# Altium PCB RWSv3a.PcbDoc
Units mil, origin at the board's own origin, x right, y up, seen from the top; angles counter-clockwise.
Board outline 3625 x 3400 mil, 2 copper layers (Component Side, Bottom Layer), stack 65.756 mil thick; 75 components, 63 nets, 336 pads, 90 vias.
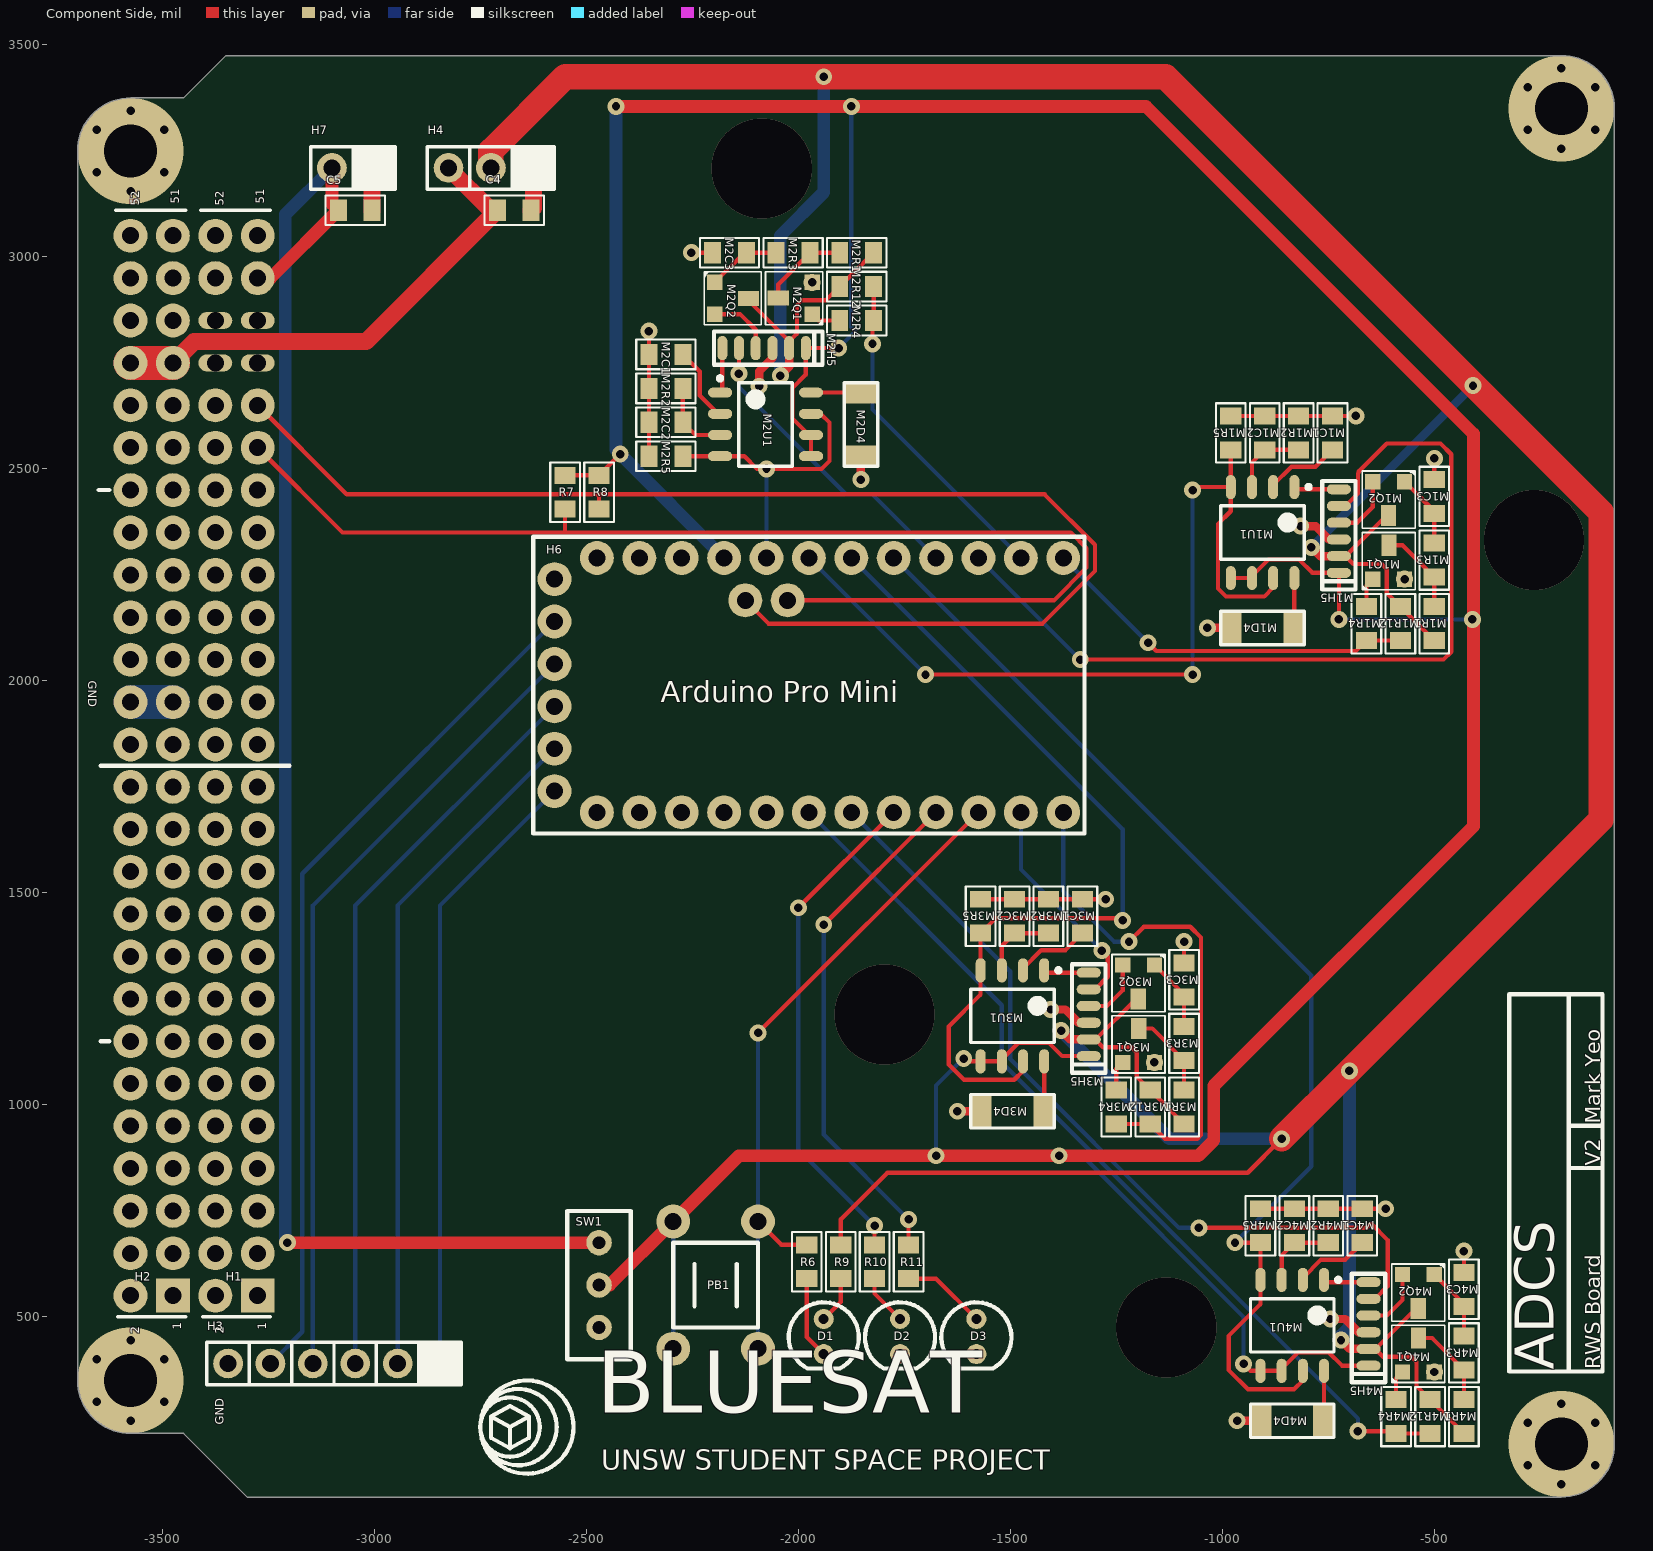
[diagram p0: Component Side view]
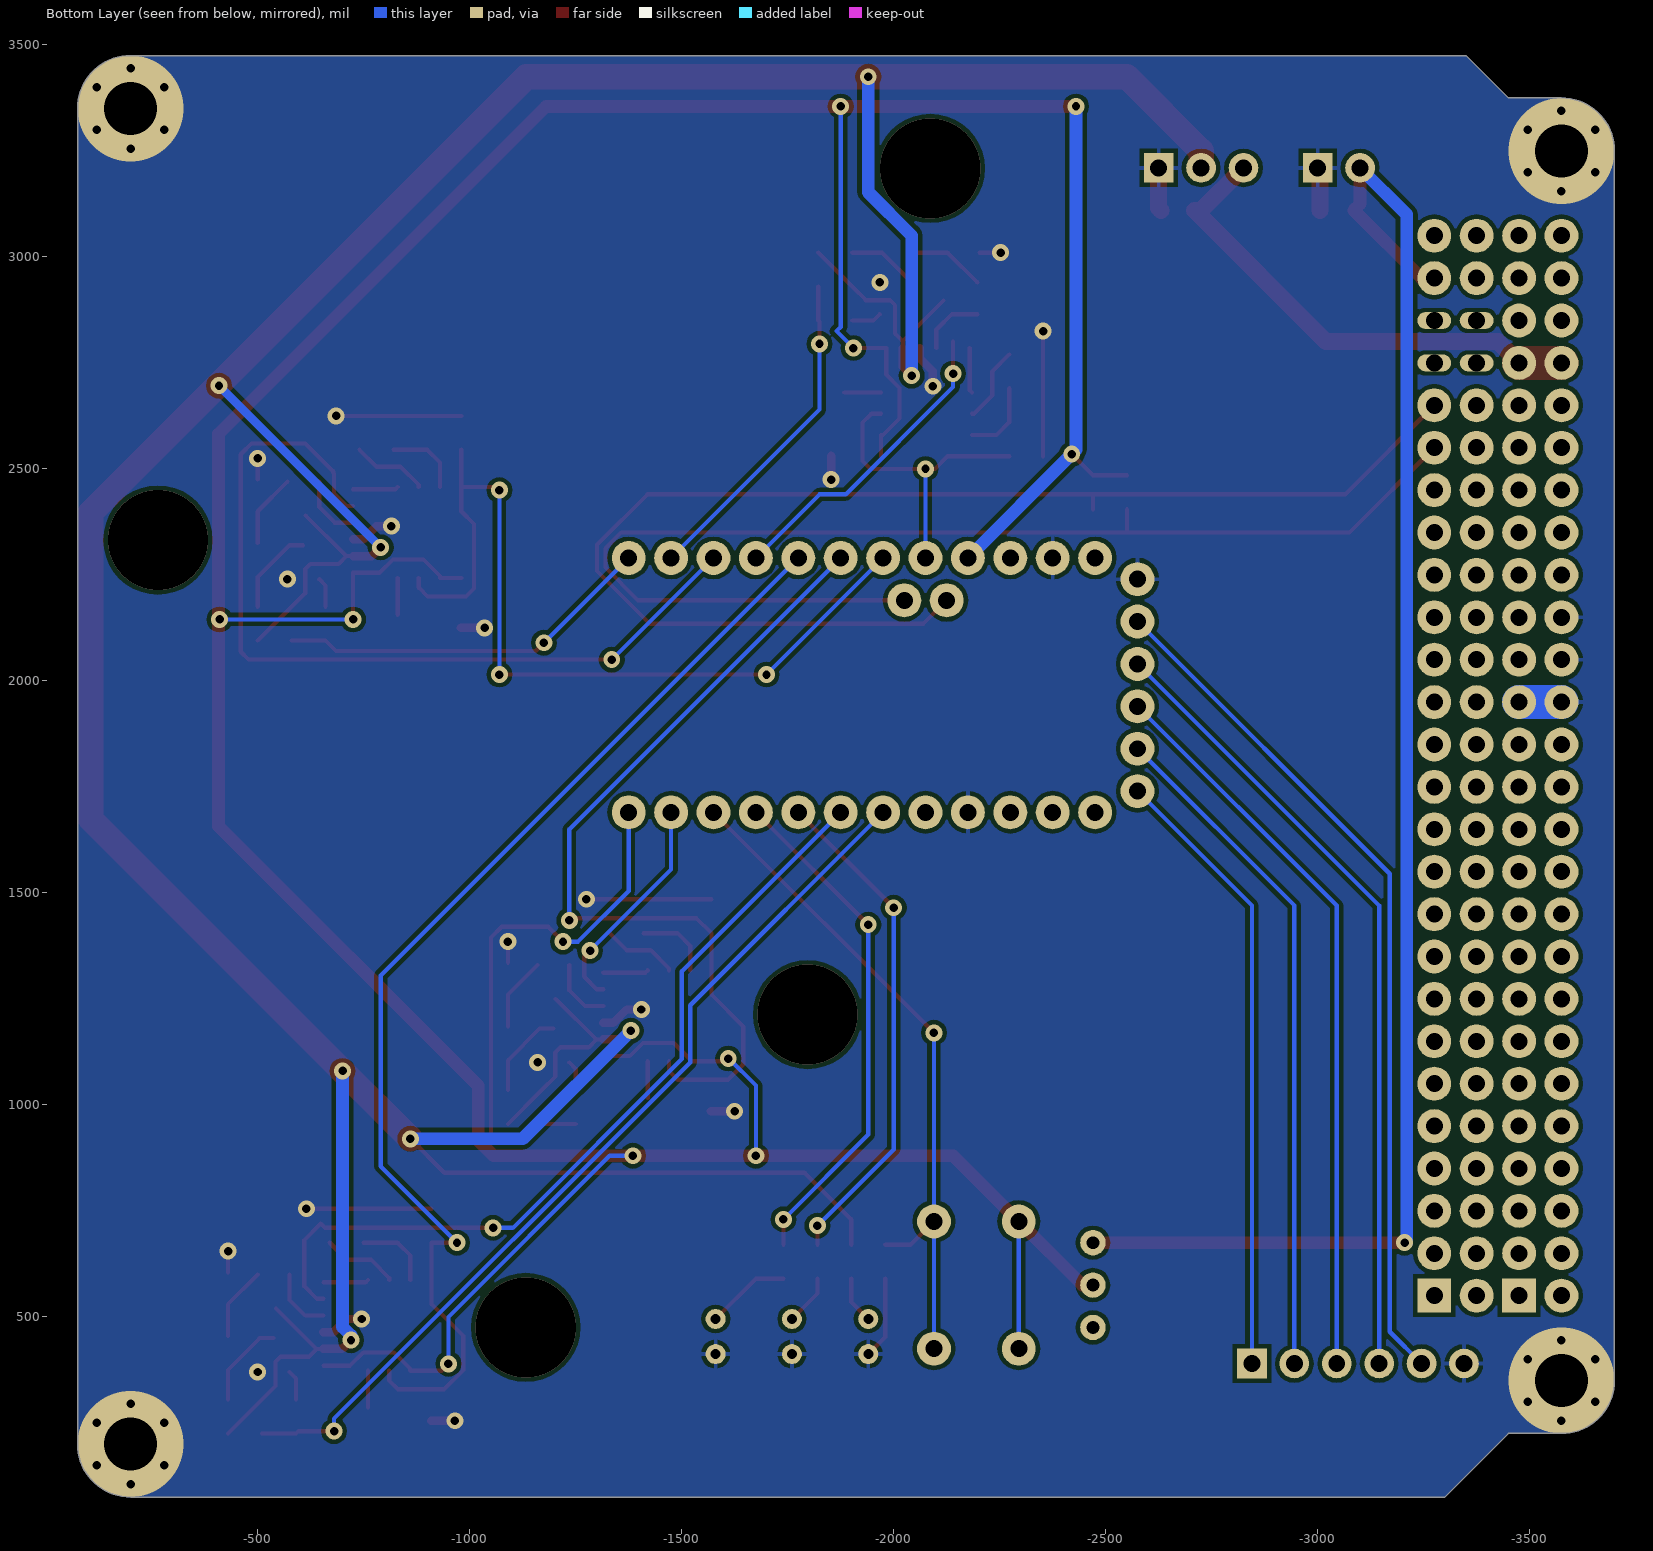
[diagram p1: Bottom Layer view, seen from below]

## Layer stack, top to bottom
Top Solder: solder mask 0.394, Solder Resist, Dk 3.5
Component Side: signal copper 1.378
Dielectric 1: core 63, FR-4, Dk 4.2
Bottom Layer: signal copper 1.378
Solder Side: solder mask 0.394, Solder Resist, Dk 3.5

## Board outline
-3575,225 cw(c-3575,350) -3700,350 -3700,3250 cw(c-3575,3250) -3575,3375 -3450,3375 -3350,3475 -200,3475 cw(c-200,3350) -75,3350 -75,200 cw(c-200,200) -200,75 -3300,75 -3450,225

## Design rules (kind name [scope] priority, off if disabled: settings)
Clearance [All] p1: gap=10
Clearance "Clearance (Same Net)" [All] p2: gap=0 except(8: SMDPad-SMDPad SMDPad-THPad SMDPad-Via)
ComponentClearance [All] p1: gap=0 collisioncheckmode=3 verticalgap=0 showdistances=FALSE
HoleSize HoleSize_1 [All] p1: absolutevalues=TRUE maxlimit=100000 minlimit=24 maxpercent=80.000 minpercent=20.000
HoleSize [All] p2: absolutevalues=TRUE maxlimit=100 minlimit=1 maxpercent=80.000 minpercent=20.000
HoleToHoleClearance mdViaViaSameLayer [All] p1: gap=8 allowstackedmicrovias=TRUE
HoleToHoleClearance [All] p2: gap=10 allowstackedmicrovias=TRUE
PasteMaskExpansion mlMinCreamFrame [All] p1: expansion=0
PasteMaskExpansion [All] p2: expansion=0
PlaneConnect PlaneConnect_1 [All] p1: planeconnectstyle=Relief reliefexpansion=20 reliefentries=4 reliefconductorwidth=10 reliefairgap=10
PlaneConnect PlaneConnect_2 [IsVia AND InNet('GND')] p2: planeconnectstyle=Direct reliefexpansion=20 reliefentries=4 reliefconductorwidth=10 reliefairgap=10
PolygonConnect ThermalVias [IsVia] p1: connectstyle=Direct reliefconductorwidth=10 reliefentries=4 polygonreliefangle="90 Angle" airgapwidth=10
PolygonConnect [All] p2: connectstyle=Relief reliefconductorwidth=10 reliefentries=4 polygonreliefangle="90 Angle" airgapwidth=10
RoomDefinition M4 [InComponentClass('M4')] p1: confinementstyle=ConfineIn formatcopy=TRUE lockcomponents=FALSE outline -375,810 -985,810 -985,185 -375,185
RoomDefinition M3 [InComponentClass('M3')] p2: confinementstyle=ConfineIn formatcopy=TRUE lockcomponents=FALSE outline -1035,1540 -1645,1540 -1645,915 -1035,915
RoomDefinition M2 [InComponentClass('M2')] p3: confinementstyle=ConfineIn formatcopy=TRUE lockcomponents=FALSE outline -2407.28,3065 -2407.28,2455 -1782.28,2455 -1782.28,3065
RoomDefinition M1 [InComponentClass('M1')] p4: confinementstyle=ConfineIn formatcopy=TRUE lockcomponents=FALSE outline -445,2680 -1055,2680 -1055,2055 -445,2055
RoutingVias [All] p1: holewidth=20 width=40 viastyle="Through Hole" minholewidth=20 minwidth=40 maxholewidth=20 maxwidth=40
SilkToSilkClearance [All] p1 off: silktosilkclearance=10
SilkToSolderMaskClearance [IsPad] p1 off: minsilkscreentomaskgap=10 clearancetoexposedcopper=TRUE
SolderMaskExpansion mlMinStopFrame [All] p1: expansion=4
SolderMaskExpansion [All] p2: expansion=4
Width Width_1 [All] p1: maxlimit=100000 minlimit=6 preferedwidth=10
Width [All] p2: maxlimit=10 minlimit=8 preferedwidth=10
23 further rules are at their usual default settings.

## Classes and differential pairs
component class M1: M1C1 M1C2 M1C3 M1D4 M1H5 M1Q1 M1Q2 M1R1 M1R2 M1R3 M1R4 M1R5 M1R12 M1U1
component class M2: M2C1 M2C2 M2C3 M2D4 M2H5 M2Q1 M2Q2 M2R1 M2R2 M2R3 M2R4 M2R5 M2R12 M2U1
component class M3: M3C1 M3C2 M3C3 M3D4 M3H5 M3Q1 M3Q2 M3R1 M3R2 M3R3 M3R4 M3R5 M3R12 M3U1
component class M4: M4C1 M4C2 M4C3 M4D4 M4H5 M4Q1 M4Q2 M4R1 M4R2 M4R3 M4R4 M4R5 M4R12 M4U1
component class RWSv3a: C4 C5 D1 D2 D3 H1 H2 H3 H4 H6 H7 PB1 R6 R7 R8 R9 R10 R11 SW1
net class DIRMOT[4..1]: DIRMOT1 DIRMOT2 DIRMOT3 DIRMOT4
net class FREQMOT[4..1]: FREQMOT1 FREQMOT2 FREQMOT3 FREQMOT4
net class SPDMOT[4..1]: SPDMOT1 SPDMOT2 SPDMOT3 SPDMOT4
channel class MotorCircuit: M1 M2 M3 M4

## Components (designator, comment, footprint, x,y, rotation, side; value= is the part's Value field where it differs from the comment)
C4 "10uF" 0805C-TBD -2700,3110 r0 top
C5 "10uF" 0805C-TBD -3075,3110 r0 top
D1 "LED" LED -1940,495 r0 top
D2 "LED" LED -1760,495 r0 top
D3 "LED" LED -1580,495 r0 top
H1 "26X2 Header" "26X2 Header"#1 -3275,550 r90 top
H2 "26X2 Header" "26X2 Header"#2 -3475,550 r90 top
H3 "HEADER-1X6" HEADER-1X6 -2845,390 r270 top
H4 "HEADER-1X3" HEADER-1X3 -2625,3210 r270 top
H6 "Arduino Pro Mini" "Arduino Pro Mini" -2475,1690 r90 top
H7 "HEADER-1X2" HEADER-1X2 -3000,3210 r270 top
M1C1 "10nF" 0805C-TBD -740,2555 r90 top (schematic designator C1)
M1C2 "1uF" 0805C-GENERIC -900,2555 r90 top (schematic designator C2)
M1C3 "2u2" 0805C-GENERIC -500,2405 r90 top (schematic designator C3)
M1D4 "LL4148" LL4148 -905,2125 r180 top (schematic designator D4)
M1H5 "Motor Header" "Motor Header" -725,2255 r180 top (schematic designator H5)
M1Q1 "MMBT3904" SOT23-BCE -645,2240 r90 top (schematic designator Q1)
M1Q2 "MMBT3904" SOT23-BCE -570,2470 r270 top (schematic designator Q2)
M1R1 "1K" 0805R-1K -500,2105 r90 top (schematic designator R1)
M1R2 "100K" 0805R-100K -820,2555 r90 top (schematic designator R2)
M1R3 "150K" 0805R-150K -500,2255 r90 top (schematic designator R3)
M1R4 "10K" 0805R-10K -660,2095 r90 top (schematic designator R4)
M1R5 "10K" 0805R-10K -980,2545 r90 top (schematic designator R5)
M1R12 "10K" 0805R-10K -580,2095 r90 top (schematic designator R12)
M1U1 "LM2907" LM2907 -905,2350 r270 top (schematic designator U1)
M2C1 "10nF" 0805C-TBD -2282.28,2770 r180 top (schematic designator C1)
M2C2 "1uF" 0805C-GENERIC -2282.28,2610 r180 top (schematic designator C2)
M2C3 "2u2" 0805C-GENERIC -2132.28,3010 r180 top (schematic designator C3)
M2D4 "LL4148" LL4148 -1852.28,2605 r270 top (schematic designator D4)
M2H5 "Motor Header" "Motor Header" -1982.28,2785 r270 top (schematic designator H5)
M2Q1 "MMBT3904" SOT23-BCE -1967.28,2865 r180 top (schematic designator Q1)
M2Q2 "MMBT3904" SOT23-BCE -2197.28,2940 r0 top (schematic designator Q2)
M2R1 "1K" 0805R-1K -1832.28,3010 r180 top (schematic designator R1)
M2R2 "100K" 0805R-100K -2282.28,2690 r180 top (schematic designator R2)
M2R3 "150K" 0805R-150K -1982.28,3010 r180 top (schematic designator R3)
M2R4 "10K" 0805R-10K -1822.28,2850 r180 top (schematic designator R4)
M2R5 "10K" 0805R-10K -2272.28,2530 r180 top (schematic designator R5)
M2R12 "10K" 0805R-10K -1822.28,2930 r180 top (schematic designator R12)
M2U1 "LM2907" LM2907 -2077.28,2605 r0 top (schematic designator U1)
M3C1 "10nF" 0805C-TBD -1330,1415 r90 top (schematic designator C1)
M3C2 "1uF" 0805C-GENERIC -1490,1415 r90 top (schematic designator C2)
M3C3 "2u2" 0805C-GENERIC -1090,1265 r90 top (schematic designator C3)
M3D4 "LL4148" LL4148 -1495,985 r180 top (schematic designator D4)
M3H5 "Motor Header" "Motor Header" -1315,1115 r180 top (schematic designator H5)
M3Q1 "MMBT3904" SOT23-BCE -1235,1100 r90 top (schematic designator Q1)
M3Q2 "MMBT3904" SOT23-BCE -1160,1330 r270 top (schematic designator Q2)
M3R1 "1K" 0805R-1K -1090,965 r90 top (schematic designator R1)
M3R2 "100K" 0805R-100K -1410,1415 r90 top (schematic designator R2)
M3R3 "150K" 0805R-150K -1090,1115 r90 top (schematic designator R3)
M3R4 "10K" 0805R-10K -1250,955 r90 top (schematic designator R4)
M3R5 "10K" 0805R-10K -1570,1405 r90 top (schematic designator R5)
M3R12 "10K" 0805R-10K -1170,955 r90 top (schematic designator R12)
M3U1 "LM2907" LM2907 -1495,1210 r270 top (schematic designator U1)
M4C1 "10nF" 0805C-TBD -670,685 r90 top (schematic designator C1)
M4C2 "1uF" 0805C-GENERIC -830,685 r90 top (schematic designator C2)
M4C3 "2u2" 0805C-GENERIC -430,535 r90 top (schematic designator C3)
M4D4 "LL4148" LL4148 -835,255 r180 top (schematic designator D4)
M4H5 "Motor Header" "Motor Header" -655,385 r180 top (schematic designator H5)
M4Q1 "MMBT3904" SOT23-BCE -575,370 r90 top (schematic designator Q1)
M4Q2 "MMBT3904" SOT23-BCE -500,600 r270 top (schematic designator Q2)
M4R1 "1K" 0805R-1K -430,235 r90 top (schematic designator R1)
M4R2 "100K" 0805R-100K -750,685 r90 top (schematic designator R2)
M4R3 "150K" 0805R-150K -430,385 r90 top (schematic designator R3)
M4R4 "10K" 0805R-10K -590,225 r90 top (schematic designator R4)
M4R5 "10K" 0805R-10K -910,675 r90 top (schematic designator R5)
M4R12 "10K" 0805R-10K -510,225 r90 top (schematic designator R12)
M4U1 "LM2907" LM2907 -835,480 r270 top (schematic designator U1)
PB1 "PushButton" PushButton -2095,425 r90 top
R6 "4K7" 0805R-4K7 -1980,660 r270 top
R7 "4K7" 0805R-4K7 -2550,2475 r270 top
R8 "4K7" 0805R-4K7 -2470,2475 r270 top
R9 "300R" 0805R-150 -1900,660 r270 top
R10 "150R" 0805R-150 -1820,660 r270 top
R11 "150R" 0805R-150 -1740,660 r270 top
SW1 "ToggleSwitch" SWITCHFOOTPRINT -2470,675 r180 top

## Footprints (in the part's own frame and the unit in brackets; to place one, negate y for a bottom-side part, rotate by r counter-clockwise, add the part's x,y. Pads: shape width x height; smd on the part's side, far side on the other; paste and mask are expansions set on the pad)
"26X2 Header"#1 [mil]
  rect 80x80 hole 40: 1(0,0)
  round 80 hole 40: 2(0,100) 3(100,0) 4(100,100) 5(200,0) 6(200,100) 7(300,0) 8(300,100) 9(400,0) 10(400,100) 11(500,0) 12(500,100) 13(600,0) 14(600,100) 15(700,0) 16(700,100) 17(800,0) 18(800,100) 19(900,0) 20(900,100) 21(1000,0) 22(1000,100) 23(1100,0) 24(1100,100) 25(1200,0) 26(1200,100) 27(1300,0) 28(1300,100) 29(1400,0) 30(1400,100) 31(1500,0) 32(1500,100) 33(1600,0) 34(1600,100) 35(1700,0) 36(1700,100) 37(1800,0) 38(1800,100) 39(1900,0) 40(1900,100) 41(2000,0) 42(2000,100) 43(2100,0) 44(2100,100) 49(2400,0) 50(2400,100) 51(2500,0) 52(2500,100)
  oval 40x80 hole 40: 45(2200,0) 46(2200,100) 47(2300,0) 48(2300,100)
  silkscreen extent -50,-30 2560,135, body extent -55,-47 2555,150, height 335
"26X2 Header"#2 [mil]
  rect 80x80 hole 40: 1(0,0)
  round 80 hole 40: 2(0,100) 3(100,0) 4(100,100) 5(200,0) 6(200,100) 7(300,0) 8(300,100) 9(400,0) 10(400,100) 11(500,0) 12(500,100) 13(600,0) 14(600,100) 15(700,0) 16(700,100) 17(800,0) 18(800,100) 19(900,0) 20(900,100) 21(1000,0) 22(1000,100) 23(1100,0) 24(1100,100) 25(1200,0) 26(1200,100) 27(1300,0) 28(1300,100) 29(1400,0) 30(1400,100) 31(1500,0) 32(1500,100) 33(1600,0) 34(1600,100) 35(1700,0) 36(1700,100) 37(1800,0) 38(1800,100) 39(1900,0) 40(1900,100) 41(2000,0) 42(2000,100) 43(2100,0) 44(2100,100) 45(2200,0) 46(2200,100) 47(2300,0) 48(2300,100) 49(2400,0) 50(2400,100) 51(2500,0) 52(2500,100)
  silkscreen extent -50,-30 2560,135, body extent -55,-47 2555,150, height 335
0805C-GENERIC [mil] "CAPACITOR 0805"
  rect 40x50 smd: 1(-10,0) 2(70,0)
  silkscreen extent -40,-35 100,35, body extent -11,-25 70,25, height 26
0805C-TBD [mil] "CAPACITOR 0805"
  rect 40x50 smd: 1(-10,0) 2(70,0)
  silkscreen extent -40,-35 100,35, body extent -11,-25 70,25, height 26
0805R-1K [mil] "RESISTOR 0805"
  rect 40x50 smd: 1(-10,0) 2(70,0)
  silkscreen extent -40,-35 100,35, body extent -11,-25 70,25, height 27
0805R-4K7 [mil] "RESISTOR 0805"
  rect 40x50 smd: 1(-10,0) 2(70,0)
  silkscreen extent -40,-35 100,35, body extent -11,-25 70,25, height 27
0805R-10K [mil] "RESISTOR 0805"
  rect 40x50 smd: 1(0,0) 2(80,0)
  silkscreen extent -30,-35 110,35, body extent -1,-25 80,25, height 27
0805R-100K [mil] "RESISTOR 0805"
  rect 40x50 smd: 1(-10,0) 2(70,0)
  silkscreen extent -40,-35 100,35, body extent -11,-25 70,25, height 27
0805R-150 [mil] "RESISTOR 0805"
  rect 40x50 smd: 1(-10,0) 2(70,0)
  silkscreen extent -40,-35 100,35, body extent -11,-25 70,25, height 27
0805R-150K [mil] "RESISTOR 0805"
  rect 40x50 smd: 1(-10,0) 2(70,0)
  silkscreen extent -40,-35 100,35, body extent -11,-25 70,25, height 27
"Arduino Pro Mini" [mil]
  round 80 hole 40: 1(0,0) 2(0,-100) 3(0,-200) 4(0,-300) 5(0,-400) 6(0,-500) 7(0,-600) 8(0,-700) 9(0,-800) 10(0,-900) 11(0,-1000) 12(0,-1100) 13(600,0) 14(600,-100) 15(600,-200) 16(600,-300) 17(600,-400) 18(600,-500) 19(600,-600) 20(600,-700) 21(600,-800) 22(600,-900) 23(600,-1000) 24(600,-1100) 25(500,-350) 26(500,-450) 27(50,100) 28(150,100) 29(250,100) 30(350,100) 31(450,100) 32(550,100)
  silkscreen extent -50,-1150 650,150
HEADER-1X2 [mil]
  rect 70x70 hole 40: 1(0,0)
  round 70 hole 40: 2(0,-100)
  silkscreen extent -50,-150 50,50, body extent -50,-150 50,50, height 470
HEADER-1X3 [mil]
  rect 70x70 hole 40: 1(0,0)
  round 70 hole 40: 2(0,-100) 3(0,-200)
  silkscreen extent -50,-250 50,50, body extent -50,-250 50,50, height 470
HEADER-1X6 [mil]
  rect 70x70 hole 40: 1(0,0)
  round 70 hole 40: 2(0,-100) 3(0,-200) 4(0,-300) 5(0,-400) 6(0,-500)
  silkscreen extent -50,-550 50,50, body extent -50,-550 50,50, height 470
LED [mm]
  round 1.2 hole 0.6: 1(0,0) 2(0,-2.1)
  silkscreen extent -2.1,-2.96 2.1,1
LL4148 [mm] "Signal Diode"
  rect 1.25x2 smd: 1(-1.875,0) 2(1.875,0)
  silkscreen extent -2.5,-1 2.5,1
LM2907 [mm] "Frequency to Voltage Converter"
  oval 1.45x0.6 smd: 1(-2.725,1.905) 2(-2.725,0.635) 3(-2.725,-0.635) 4(-2.725,-1.905) 5(2.725,-1.905) 6(2.725,-0.635) 7(2.725,0.635) 8(2.725,1.905)
  silkscreen extent -2.85,-2.5 1.6,2.88, body extent -3,-2.5 3,2.5, height 1.75
"Motor Header" [mm]
  oval 1.45x0.6 smd: 1(0,0) 2(0,-1) 3(0,-2) 4(0,-3) 5(0,-4) 6(0,-5)
  silkscreen extent -1,-5.5 1,1
PushButton [mil]
  round 80 hole 40: 5(0,0) 6(300,0) 7(0,200) 8(300,200)
  silkscreen extent 50,0 250,200, body extent 50,0 250,200, height 300
SOT23-BCE [mil]
  rect 36x36 smd: B(0,0) E(0,-75)
  rect 50x36 smd: C(80,-38)
  silkscreen extent -25,-100 110,25, body extent -3,-95 94,20, height 41
SWITCHFOOTPRINT [mil]
  round 60 hole 30: 2(0,0) 3(0,100) 4(0,200)
  silkscreen extent -75,-75 75,275, body extent -75,-75 75,275, height 300

## Part data
C4 C5 M1C1 M2C1 M3C1 M4C1: library part 0805C-100nF-25V-X7R-MUR, "CAPACITOR 0805 CERAMIC"
D1 D2 D3: "Small LED"
M1C2 M2C2 M3C2 M4C2: library part 0805C-10UF-6V3-X5R-PAN, "CAPACITOR 0805 CERAMIC"
M1C3 M2C3 M3C3 M4C3: library part 0805C-2U2-6V3-X5R-PAN, "CAPACITOR 0805 CERAMIC"
M1D4 M2D4 M3D4 M4D4: "Signal Diode"
M1Q1 M1Q2 M2Q1 M2Q2 M3Q1 M3Q2 M4Q1 M4Q2: library part MMBT2222, "BC847 SMALL SIGNAL NPN TRANSISTOR"
M1R1 M2R1 M3R1 M4R1: library part 0805R-1K, "RESISTOR 0805 1/4 WATT THIN FILM"
M1R2 M2R2 M3R2 M4R2: library part 0805R-100K, "RESISTOR 0805 1/4 WATT THIN FILM"
M1R3 M2R3 M3R3 M4R3: library part 0805R-150K, "RESISTOR 0805 1/4 WATT THIN FILM"
M1R4 M1R5 M1R12 M2R4 M2R5 M2R12 M3R4 M3R5 M3R12 M4R4 M4R5 M4R12: library part 0805R-10K, "RESISTOR 0805 1/4 WATT THIN FILM"
M1U1 M2U1 M3U1 M4U1: "Freq to Voltage Converter"
R6 R7 R8: library part 0805R-4K7, "RESISTOR 0805 1/4 WATT THIN FILM"
R9 R10 R11: library part 0805R-150, "RESISTOR 0805 1/4 WATT THIN FILM"

## Via types
v1: diameter 40, hole 20, Component Side to Bottom Layer, 82 vias
v2: diameter 250, hole 125, Component Side to Bottom Layer, 4 vias
v3: diameter 236.22, hole 236.22, Component Side to Bottom Layer, 4 vias

## Nets (pads, with @x,y where several pads share a name; then routed paths per layer and width w, separated by ;. In a path a pad name is that pad's centre, name@x,y a point inside that pad or via, vN(x,y) a via of type N, cw(c..) or ccw(c..) an arc to the next point about the centre after c; other vN are vias at no path point)
3V3_IN: H1.50
5V_IN: C5.1 H1.49 H7.2 SW1.2 | length 3673.1
  Component Side w30: H1.49 -3245,2950 C5.1 -3100,3125 H7.2 ; v1(-3205,675) SW1.2@-2475,675
  Bottom Layer w30: v1@-3210,675 -3210,3100 H7.2
7V4: H4.2 M1H5.2 M1Q2.C M1R1.1 M1R12.2 M2H5.2 M2Q2.C M2R1.1 M2R12.2 M3H5.2 M3Q2.C M3R1.1 M3R12.2 M4H5.2 M4Q2.C M4R1.1 M4R12.2 R9.1 | length 10854.9
  Component Side w10: M2Q2.C@-2117.28,2897 -2021.65,2801.37 M2H5.2@-2021.65,2800.63 ; M2H5.2 M2H5.2@-2021.65,2800.63 ; R9.1 -1900,730 -1790,840 -940,840 v1(-860,920) ; M2R1.1 M2R12.2 -1934.28,2898 -1991.5,2898 -2003.28,2886.21 -2003.28,2819 M2H5.2@-2021.65,2800.63 ; M3H5.2 M3H5.2@-1299.37,1154.37 ; M3Q2.C@-1203,1250 -1298.63,1154.37 M3H5.2@-1299.37,1154.37 ; M3R1.1 M3R12.2 -1202,1067 -1202,1124.21 -1213.79,1136 -1281,1136 M3H5.2@-1299.37,1154.37 ; M1H5.2 M1H5.2@-709.37,2294.37 ; M4H5.2 M4H5.2@-639.37,424.37 ; M1Q2.C@-613,2390 -708.63,2294.37 M1H5.2@-709.37,2294.37 ; M4Q2.C@-543,520 -638.63,424.37 M4H5.2@-639.37,424.37 ; M1R1.1 M1R12.2 -612,2207 -612,2264.21 -623.79,2276 -691,2276 M1H5.2@-709.37,2294.37 ; M4R1.1 M4R12.2 -542,337 -542,394.21 -553.79,406 -621,406 M4H5.2@-639.37,424.37
  Component Side w20: v1@-2037.28,2725 -2021.65,2740.63 M2H5.2 ; v1@-1375,1170 -1359.37,1154.37 M3H5.2 ; v1@-785,2310 -769.37,2294.37 M1H5.2 ; v1@-715,440 -699.37,424.37 M4H5.2
  Component Side w60: H4.2 -2725,3250 -2550,3425 v1(-1940,3425) -1133.68,3425 -106.46,2397.77 -106.46,1673.54 v1(-700,1080) v1(-860,920)
  Bottom Layer w20: v1(-790,2315) v1(-408.68,2696.32)
  Bottom Layer w30: v1(-2042.28,2720) -2042.28,3050.21 -1940,3152.49 v1(-1940,3425) ; v1(-1380,1175) -1125,920 v1(-860,920) ; v1(-720,445) -720,456.36 -700,476.36 v1(-700,1080)
7V4_IN: C4.1 H2.45 H2.46 H4.3 | length 1170.5
  Component Side w40: H2.45 -3425,2800 -3020,2800 C4.1 -2725,3110 H4.3
  Component Side w80: H2.46 H2.45
DIRMOT1: H6.22 M1H5.5 | length 2050.5
  Component Side w10: v1@-1335.63,2050.63 -478.16,2050.63 -460,2068.79 -460,2534.5 -485.5,2560 -612.21,2560 -678,2494.21 -678,2492 ; M1H5.5 -709.72,2412.48 -680,2442.2 -680,2490
  Bottom Layer w10: H6.22 v1@-1335.63,2050.63
  other v1: -1335,2050
DIRMOT2: H6.21 M2H5.5 | length 738.8
  Component Side w10: v1(-2140,2725) M2H5.5@-2140,2784.76 ; M2H5.5 M2H5.5@-2139.76,2800.28
  Bottom Layer w10: v1(-2140,2725) -2140,2693.22 -1886.78,2440 -1825,2440 H6.21
DIRMOT3: H6.11 M3H5.5 | length 512.2
  Component Side w10: M3H5.5 -1299.72,1272.48 -1270,1302.2 v1@-1270,1350 ; v1@-1285,1365 v1(-1283.79,1363.79)
  Bottom Layer w10: H6.11 -1475,1555 v1(-1283.79,1363.79)
DIRMOT4: H6.7 M4H5.5 | length 1978.6
  Component Side w10: v1(-1055,710) -658.79,710 -648.79,720 -610,681.21 -610,572.2 -639.72,542.48 M4H5.5
  Bottom Layer w10: H6.7 -1500,1315 -1500,1108.28 -1101.72,710 v1(-1055,710)
FREQMOT1: H6.18 M1R5.1 M1U1.4 M1U1.7 | length 2055.5
  Component Side w10: v1(-1700,2015) v1(-1070,2015) ; v1(-1070,2450) -1062.72,2457.28 M1U1.4 ; M1R5.1 M1U1.4 ; M1U1.7 -880,2220 -900.83,2199.17 -991.11,2199.17 -1010,2218.07 -1010,2370 -980,2400 M1U1.4
  Bottom Layer w10: H6.18 v1(-1700,2015) ; v1(-1070,2015) v1(-1070,2450)
FREQMOT2: H6.17 M2R5.1 M2U1.4 M2U1.7 | length 718.5
  Component Side w10: M2R5.1 M2U1.4 -2127.28,2530 -2097.28,2500 v1(-2075,2500) -1945.35,2500 -1926.46,2518.89 -1926.46,2609.17 -1947.28,2630 M2U1.7
  Bottom Layer w10: H6.17 v1(-2075,2500)
FREQMOT3: H6.19 M3R5.1 M3U1.4 M3U1.7 | length 2033.9
  Component Side w10: M3U1.7 -1470,1080 -1490.83,1059.17 -1609.17,1059.17 -1645,1095 -1645,1185 -1570,1260 M3U1.4 M3R5.1 -1535,1440 -1240,1440 v1(-1235,1435)
  Bottom Layer w10: H6.19 -1235,1650 v1(-1235,1435)
FREQMOT4: H6.20 M4R5.1 M4U1.4 M4U1.7 | length 2714
  Component Side w10: v1(-970,675) M4R5.1 M4U1.4 -910,530 -985,455 -985,375 -939.17,329.17 -830.83,329.17 -810,350 M4U1.7
  Bottom Layer w10: H6.20 -790,1305 -790,855 v1(-970,675)
GND: C4.2 C5.2 D1.2 D2.2 D3.2 H2.29 H2.30 H2.32 H2.34 H3.6 H4.1 H6.4 H6.14 H6.32 H7.1 M1C1.2 M1C2.2 M1C3.2 M1D4.2 M1H5.3 M1Q1.E M1R2.2 M1R5.2 M2C1.2 M2C2.2 M2C3.2 M2D4.2 M2H5.3 M2Q1.E M2R2.2 M2R5.2 M3C1.2 M3C2.2 M3C3.2 M3D4.2 M3H5.3 M3Q1.E M3R2.2 M3R5.2 M4C1.2 M4C2.2 M4C3.2 M4D4.2 M4H5.3 M4Q1.E M4R2.2 M4R5.2 R6.2 | length 2514.9
  Component Side w10: M2R5.2 M2C2.2 M2R2.2 M2C1.2 v1(-2352.28,2825) ; v1(-2252.28,3010) M2C3.2 ; R6.2 -1980,452.32 D1.2 ; M3R5.2 M3C2.2 M3R2.2 M3C1.2 v1(-1275,1485) ; M3C3.2 v1(-1090,1385) ; M1R5.2 M1C2.2 M1R2.2 M1C1.2 v1(-685,2625) ; M4R5.2 M4C2.2 M4R2.2 M4C1.2 v1(-615,755) ; M1C3.2 v1(-500,2525) ; M4C3.2 v1(-430,655)
  Component Side w20: v1(-2092.28,2695) -2092.28,2730 -2061.02,2761.26 M2H5.3 ; v1(-1852.28,2475) M2D4.2 ; v1(-1625,985) M3D4.2 ; v1(-1405,1225) -1370,1225 -1338.74,1193.74 M3H5.3 ; v1(-1035,2125) M1D4.2 ; v1(-965,255) M4D4.2 ; v1(-815,2365) -780,2365 -748.74,2333.74 M1H5.3 ; v1(-745,495) -710,495 -678.74,463.74 M4H5.3
  Component Side w40: C5.2 -3005,3205 H7.1 ; C4.2 -2625,3115 H4.1
  Bottom Layer w80: H2.30 H2.29
  other v1: -200,105 -280,150 -120,150 -280,250 -120,250 -3575,255 -200,295 -3655,300 -3495,300 -500,370 -3655,400 -3495,400 -3575,445 -1160,1100 -570,2240 -1967.28,2940 -3575,3155 -3655,3200 -3495,3200 -200,3255 -3655,3300 -3495,3300 -280,3300 -120,3300 -3575,3345 -280,3400 -120,3400 -200,3445
  other v2: -200,200 -3575,350 -3575,3250 -200,3350
LED_B: H6.9 R11.1 | length 1212.6
  Component Side w10: v1(-1940,1425) H6.9 ; R11.1 v1(-1740,730)
  Bottom Layer w10: v1(-1940,1425) -1940,930 v1(-1740,730)
LED_G: H6.8 R10.1 | length 1187.8
  Component Side w10: v1(-2000,1465) H6.8 ; R10.1 v1(-1820,715)
  Bottom Layer w10: v1(-2000,1465) -2000,895 v1(-1820,715)
M1FREQ: M1H5.6 M1U1.1 | length 107.3
  Component Side w10: M1U1.1 -824.57,2451.85 M1H5.6
M1SPD: M1H5.4 M1Q2.E | length 155.3
  Component Side w10: M1H5.4 -681.89,2373.11 -645,2410 M1Q2.E
M2FREQ: M2H5.6 M2U1.1 | length 107.3
  Component Side w10: M2U1.1 -2179.13,2685.43 M2H5.6
M2SPD: M2H5.4 M2Q2.E | length 155.3
  Component Side w10: M2Q2.E -2137.28,2865 -2100.39,2828.11 M2H5.4
M3FREQ: M3H5.6 M3U1.1 | length 107.3
  Component Side w10: M3U1.1 -1414.57,1311.85 M3H5.6
M3SPD: M3H5.4 M3Q2.E | length 155.3
  Component Side w10: M3H5.4 -1271.89,1233.11 -1235,1270 M3Q2.E
M4FREQ: M4H5.6 M4U1.1 | length 107.3
  Component Side w10: M4U1.1 -754.57,581.85 M4H5.6
M4SPD: M4H5.4 M4Q2.E | length 155.3
  Component Side w10: M4H5.4 -611.89,503.11 -575,540 M4Q2.E
NetD1_1: D1.1 R9.2 | length 111.6
  Component Side w10: D1.1 -1900,535 R9.2
NetD2_1: D2.1 R10.2 | length 119.9
  Component Side w10: R10.2 -1820,555 D2.1
NetD3_1: D3.1 R11.2 | length 199.4
  Component Side w10: R11.2 -1675,590 D3.1
NetH3_1: H3.1 H6.27 | length 1491.1
  Bottom Layer w10: H3.1@-2874.29,390 H3.1 -2845,1470 H6.27
NetH3_2: H3.2 H6.28 | length 1603.3
  Bottom Layer w10: H3.2 -2945,1470 H6.28
NetH3_3: H3.3 H6.29 | length 1744.7
  Bottom Layer w10: H3.3 -3045,1470 H6.29
NetH3_4: H3.4 H6.30 | length 1886.1
  Bottom Layer w10: H3.4 -3145,1470 H6.30
NetH3_5: H3.5 H6.31 | length 2027.5
  Bottom Layer w10: H3.5 -3170,465 -3170,1545 H6.31
NetM1C1_1: M1C1.1 M1U1.2 | length 179.1
  Component Side w10: M1U1.2 -880,2461.93 -836.93,2505 -780,2505 M1C1.1
NetM1C2_1: M1C2.1 M1R2.1 M1U1.3 | length 180.1
  Component Side w10: M1U1.3 -930,2515 M1C2.1 M1R2.1
NetM1C3_1: M1C3.1 M1Q2.B M1R3.2 | length 174
  Component Side w10: M1Q2.B -500,2400 M1C3.1 M1R3.2
NetM1D4_1: M1D4.1 M1U1.8 | length 86.5
  Component Side w10: M1D4.1@-830,2156.18 M1U1.8
NetM1Q1_B: M1Q1.B M1R4.2 | length 71.2
  Component Side w10: M1R4.2 -660,2225 M1Q1.B
NetM1Q1_C: M1Q1.C M1R1.2 M1R3.1 | length 208.1
  Component Side w10: M1Q1.C -575,2320 M1R3.1 M1R1.2
NetM2C1_1: M2C1.1 M2U1.2 | length 179.1
  Component Side w10: M2C1.1 -2232.28,2730 -2232.28,2673.07 -2189.22,2630 M2U1.2
NetM2C2_1: M2C2.1 M2R2.1 M2U1.3 | length 180.1
  Component Side w10: M2R2.1 M2C2.1 -2242.28,2580 M2U1.3
NetM2C3_1: M2C3.1 M2Q2.B M2R3.2 | length 174
  Component Side w10: M2Q2.B -2127.28,3010 M2C3.1 M2R3.2
NetM2D4_1: M2D4.1 M2U1.8 | length 86.5
  Component Side w10: M2U1.8 M2D4.1@-1883.46,2680
NetM2Q1_B: M2Q1.B M2R4.2 | length 71.2
  Component Side w10: M2Q1.B -1952.28,2850 M2R4.2
NetM2Q1_C: M2Q1.C M2R1.2 M2R3.1 | length 208.1
  Component Side w10: M2Q1.C -2047.28,2935 M2R3.1 M2R1.2
NetM3C1_1: M3C1.1 M3U1.2 | length 179.1
  Component Side w10: M3U1.2 -1470,1321.93 -1426.93,1365 -1370,1365 M3C1.1
NetM3C2_1: M3C2.1 M3R2.1 M3U1.3 | length 180.1
  Component Side w10: M3U1.3 -1520,1375 M3C2.1 M3R2.1
NetM3C3_1: M3C3.1 M3Q2.B M3R3.2 | length 174
  Component Side w10: M3Q2.B -1090,1260 M3C3.1 M3R3.2
NetM3D4_1: M3D4.1 M3U1.8 | length 86.5
  Component Side w10: M3D4.1@-1420,1016.18 M3U1.8
NetM3Q1_B: M3Q1.B M3R4.2 | length 71.2
  Component Side w10: M3R4.2 -1250,1085 M3Q1.B
NetM3Q1_C: M3Q1.C M3R1.2 M3R3.1 | length 208.1
  Component Side w10: M3Q1.C -1165,1180 M3R3.1 M3R1.2
NetM4C1_1: M4C1.1 M4U1.2 | length 179.1
  Component Side w10: M4U1.2 -810,591.93 -766.93,635 -710,635 M4C1.1
NetM4C2_1: M4C2.1 M4R2.1 M4U1.3 | length 180.1
  Component Side w10: M4U1.3 -860,645 M4C2.1 M4R2.1
NetM4C3_1: M4C3.1 M4Q2.B M4R3.2 | length 174
  Component Side w10: M4Q2.B -430,530 M4C3.1 M4R3.2
NetM4D4_1: M4D4.1 M4U1.8 | length 86.5
  Component Side w10: M4D4.1@-760,286.18 M4U1.8
NetM4Q1_B: M4Q1.B M4R4.2 | length 71.2
  Component Side w10: M4R4.2 -590,355 M4Q1.B
NetM4Q1_C: M4Q1.C M4R1.2 M4R3.1 | length 208.1
  Component Side w10: M4Q1.C -505,450 M4R3.1 M4R1.2
PUSH_BUTTON: H6.10 PB1.5 PB1.6 R6.1 | length 1618.2
  Component Side w10: PB1.6 -2040,670 R6.1 ; v1(-2095,1170) H6.10
  Bottom Layer w10: PB1.5 PB1.6 v1(-2095,1170)
SCL_EXT: H1.43 H6.25 R8.2 | length 3107.5
  Component Side w10: H1.43 -3065,2440 -2470,2440 ; R8.2 -2470,2440 ; H6.25 -2070,2135 -1423.93,2135 -1300,2258.93 -1300,2321.07 -1418.93,2440 -2470,2440
SDA_EXT: H1.41 H6.26 R7.2 | length 2890.8
  Component Side w10: H1.41 -3075,2350 -2550,2350 ; R7.2 -2550,2350 ; H6.26 -1397.22,2190 -1320,2267.22 -1320,2312.78 -1357.22,2350 -2550,2350
SPDMOT1: H6.24 M1R4.1 M1R12.1 | length 896
  Component Side w10: v1(-1175,2090) -1155.63,2070.63 -684.37,2070.63 M1R4.1 M1R12.1
  Bottom Layer w10: H6.24 v1(-1175,2090)
SPDMOT2: H6.23 M2R4.1 M2R12.1 | length 782.3
  Component Side w10: v1(-1825,2795) M2R4.1@-1825,2847.28 ; M2R4.1 M2R12.1
  Bottom Layer w10: v1(-1825,2795) -1825,2640 H6.23
SPDMOT3: H6.12 M3R4.1 M3R12.1 | length 1268.9
  Component Side w10: M3R4.1 M3R12.1 -1135,920 -1058.79,920 -1050,928.79 -1050,1394.5 -1075.5,1420 -1185,1420 v1(-1220,1385)
  Bottom Layer w10: H6.12 -1375,1504.5 -1255.5,1385 v1(-1220,1385)
SPDMOT4: H6.6 M4R4.1 M4R12.1 | length 2160.4
  Component Side w10: v1(-680,230.5) M4R4.1@-595.5,230.5 ; M4R4.1 M4R12.1
  Bottom Layer w10: H6.6 -1520,1235 -1520,1100 -680,260 v1(-680,230.5)
VCC: H6.16 M1H5.1 M1U1.5 M1U1.6 M2H5.1 M2U1.5 M2U1.6 M3H5.1 M3U1.5 M3U1.6 M4H5.1 M4U1.5 M4U1.6 PB1.7 PB1.8 R7.1 R8.1 SW1.3 | length 10772.8
  Component Side w10: R7.1 R8.1 v1(-2420,2535) ; M2U1.5 M2U1.6 -1974.65,2580 -2013.54,2618.89 -2013.54,2691.11 -1982.28,2722.37 M2H5.1 v1(-1905,2785) ; v1(-1609.81,1109.31) -1603.22,1102.72 M3U1.5 M3U1.6 -1520,1107.37 -1481.11,1146.26 -1408.89,1146.26 -1377.63,1115 M3H5.1 ; M1U1.5 M1U1.6 -930,2247.37 -891.11,2286.26 -818.89,2286.26 -787.63,2255 M1H5.1 v1(-725,2145) ; v1(-949.81,389.31) -933.22,372.72 M4U1.5 M4U1.6 -860,377.37 -821.11,416.26 -748.89,416.26 -717.63,385 M4H5.1
  Component Side w30: SW1.3 -2445,575 PB1.8 -2140,880 v1(-1675,880) v1(-1385,880) -1056.36,880 -1020,916.36 -1020,1045 -407.68,1657.32 -407.68,2582.68 -1180,3355 v1(-1875,3355) v1(-2430,3355)
  Bottom Layer w10: PB1.7 PB1.8 ; v1(-1905,2785) -1865,2825 -1875,2835 v1(-1875,3355) ; v1(-1675,880) -1675,1045.5 -1610.5,1110 v1(-1609.81,1109.31) ; v1(-1385,880) -1330,880 -949.81,499.81 v1(-949.81,389.31) ; v1(-725,2145) v1(-410,2145)
  Bottom Layer w30: v1(-2430,3355) -2430,2545 v1(-2420,2535) H6.16
pads on no net: H1.1 H1.2 H1.3 H1.4 H1.5 H1.6 H1.7 H1.8 H1.9 H1.10 H1.11 H1.12 H1.13 H1.14 H1.15 H1.16 H1.17 H1.18 H1.19 H1.20 H1.21 H1.22 H1.23 H1.24 H1.25 H1.26 H1.27 H1.28 H1.29 H1.30 H1.31 H1.32 H1.33 H1.34 H1.35 H1.36 H1.37 H1.38 H1.39 H1.40 H1.42 H1.44 H1.45 H1.46 H1.47 H1.48 H1.51 H1.52 H2.1 H2.2 H2.3 H2.4 H2.5 H2.6 H2.7 H2.8 H2.9 H2.10 H2.11 H2.12 H2.13 H2.14 H2.15 H2.16 H2.17 H2.18 H2.19 H2.20 H2.21 H2.22 H2.23 H2.24 H2.25 H2.26 H2.27 H2.28 H2.31 H2.33 H2.35 H2.36 H2.37 H2.38 H2.39 H2.40 H2.41 H2.42 H2.43 H2.44 H2.47 H2.48 H2.49 H2.50 H2.51 H2.52 H6.1 H6.2 H6.3 H6.5 H6.13 H6.15 SW1.4
copper on no net:
  other v3: -1132.28,475.2 -1796.85,1212.99 -264.57,2332.28 -2086.22,3208.66

## Polygon pours and split planes (outlines as drawn)
GND on Bottom Layer "Bottom Layer-GND" (solid, pour order 7): -3575,225 cw(c-3575,350) -3700,350 -3700,3250 cw(c-3575,3250) -3575,3375 -3450,3375 -3350,3475 -200,3475 cw(c-200,3350) -75,3350 -75,200 cw(c-200,200) -200,75 -3300,75 -3450,225

## Silkscreen, mask and mechanical layers (free items; w line width, h text height)
Top Overlay:
  circle w10: c-2640,240 r110
  circle w10: c-2660,240 r90
  circle w10: c-2680,240 r70
  lines w10: -3650,2450 -3625,2450 ; -3645,1150 -3625,1150 ; -3645,1800 -3200,1800 ; -183,371 -183,1261 ; -183,851 -103,851 ; -183,951 -103,951 ; -2725,265 -2680,290 -2635,265 ; -2725,265 -2725,215 -2680,190 ; -2725,265 -2680,240 ; -2680,190 -2635,215 -2635,265 ; -2680,190 -2680,240 ; -2680,240 -2635,265 ; -323,371 -323,1261 -103,1261 -103,371 -323,371
  text "GND" at -3675,2000 h20 r270
  text "Mark Yeo" at -108,956 h35 r90
  text "V2" at -108,856 h35 r90
  text "RWS Board" at -108,376 h35 r90
  text "ADCS" at -188,375 h157.48 r90
  text "GND" at -3355,245 h20 r90
  text "BLUESAT" at -2475,225 h250
  text "UNSW STUDENT SPACE PROJECT" at -2465,140 h47.24
Mechanical 13:
  lines w10: -3700,350 ccw(c-3575,350) -3575,225 -3500,225 -3450,225 -3300,75 -200,75 ccw(c-200,200) -75,200 -75,3350 ccw(c-200,3350) -200,3475 -3350,3475 -3450,3375 -3500,3375 -3575,3375 ccw(c-3575,3250) -3700,3250 -3700,350

## Text inside footprints (layer, text, board x,y; h text height)
H1: Top Overlay "51" at -3260,3125.16 h20 r90; Top Overlay "52" at -3355,3120.16 h20 r90; Top Overlay "1" at -3255,470.16 h20 r90; Top Overlay "2" at -3355,460.16 h20 r90
H2: Top Overlay "51" at -3460,3125.16 h20 r90; Top Overlay "52" at -3555,3120.16 h20 r90; Top Overlay "1" at -3455,470.16 h20 r90; Top Overlay "2" at -3555,460.16 h20 r90